# Altium PCB ZYL2(1).PcbDoc (part 1 of 2)
Units mm, origin at the board's own origin, x right, y up, seen from the top; angles counter-clockwise.
Board outline 152.4 x 101.6 mm, 2 copper layers (Top Layer, Bottom Layer); 55 components, 21 nets, 1137 pads, 477 vias.
Unrouted connection lines stored in the file: 165.
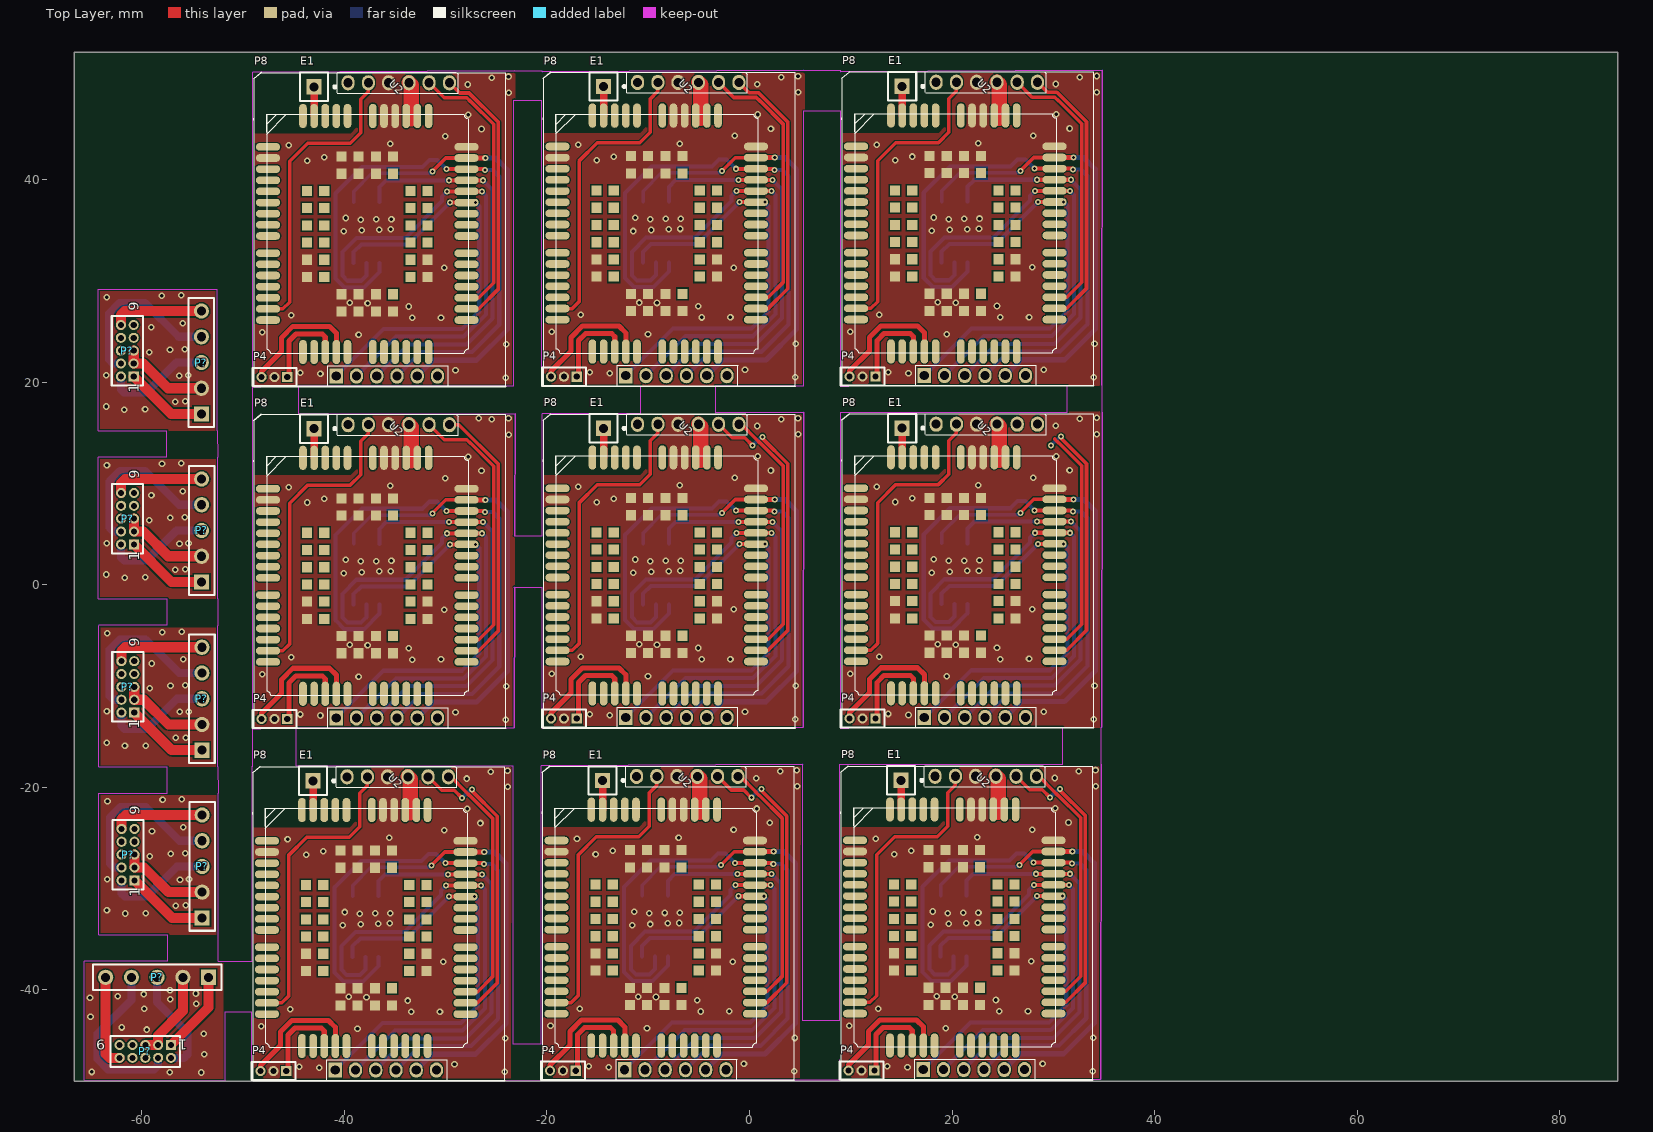
[diagram p0: Top Layer view]
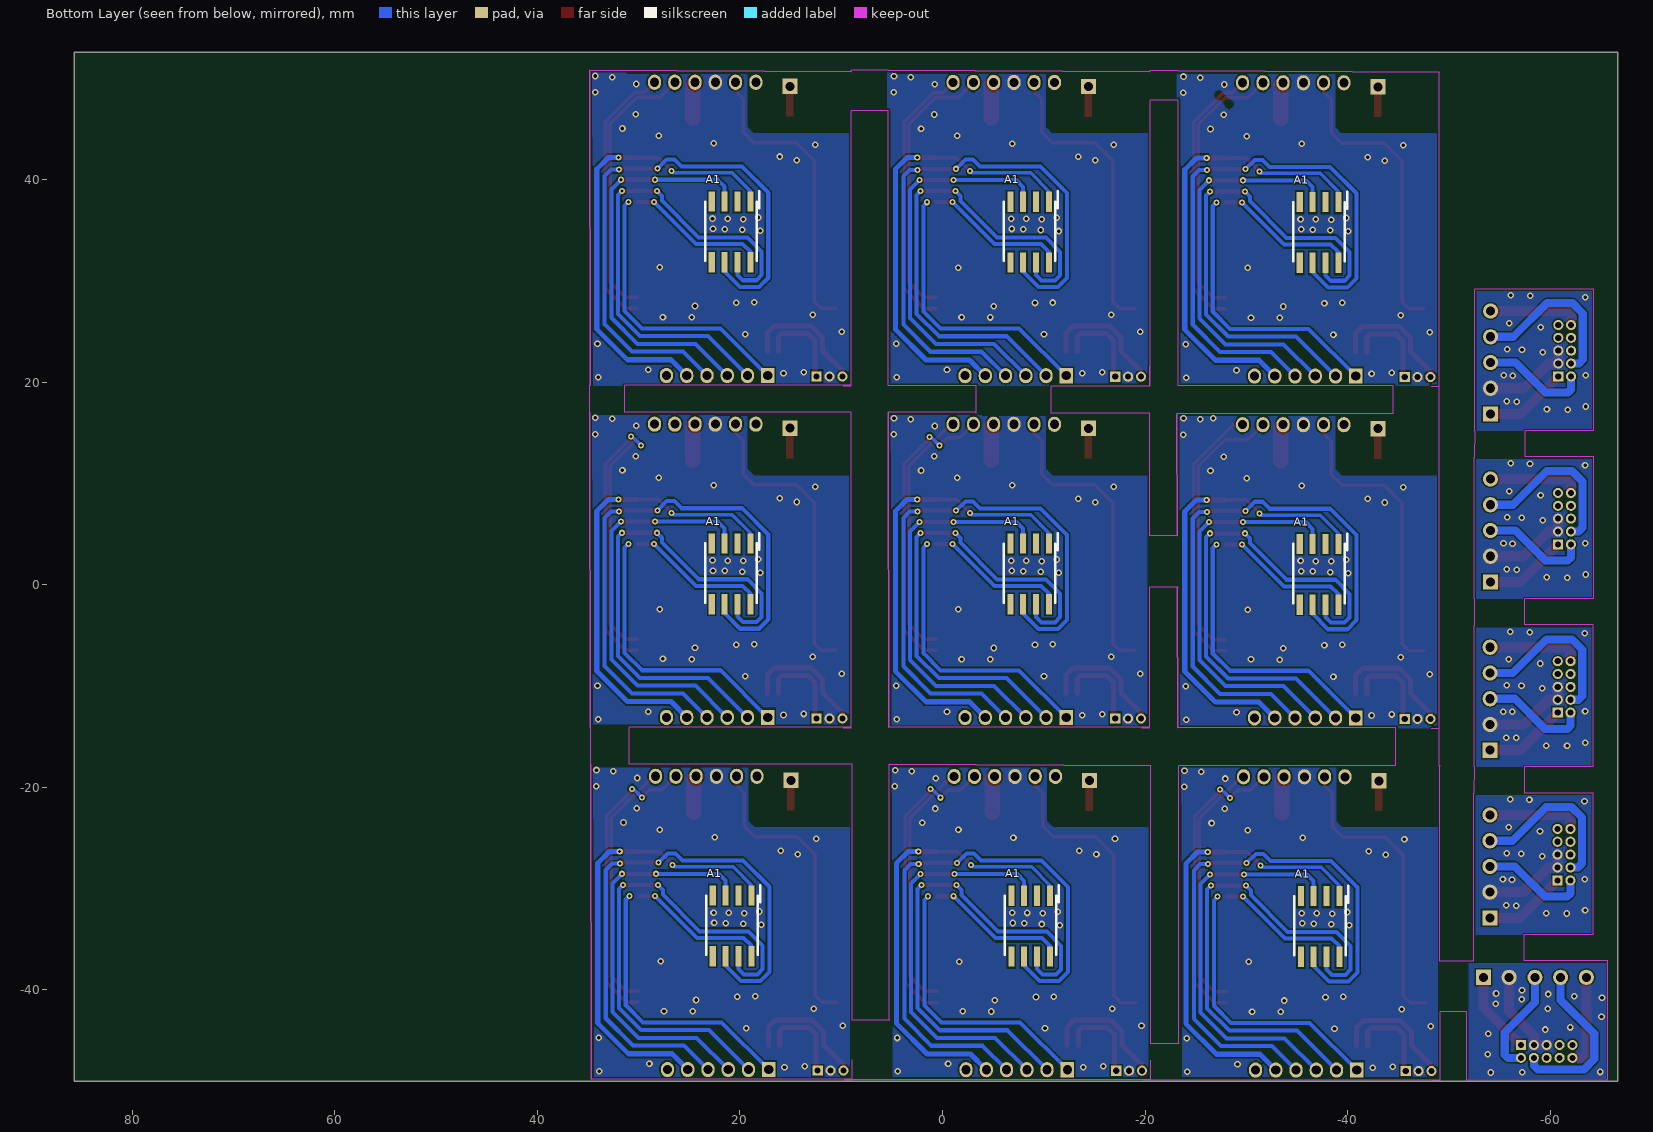
[diagram p1: Bottom Layer view, seen from below]

## Layer stack, top to bottom
Top Solder: solder mask 0.0102, Solder Resist, Dk 3.5
Top Layer: signal copper 0.0356
Dielectric 1: dielectric 0.32, FR-4, Dk 4.8
Bottom Layer: signal copper 0.0356
Bottom Solder: solder mask 0.0102, Solder Resist, Dk 3.5

## Board outline
-66.675,-49.022 85.725,-49.022 85.725,52.578 -66.675,52.578

## Design rules (kind name [scope] priority, off if disabled: settings)
Clearance [All] p1: gap=0.13 ignorepadtopadclearanceinfootprint=FALSE
HoleToHoleClearance [All] p1: gap=0 allowstackedmicrovias=TRUE
MinimumSolderMaskSliver [All] p1: minsoldermaskwidth=0
PlaneConnect [All] p1: planeconnectstyle=Direct reliefexpansion=0.508 reliefentries=4 reliefconductorwidth=0.254 reliefairgap=0.254
PolygonConnect [All] p1: connectstyle=Direct reliefconductorwidth=0.254 reliefentries=4 polygonreliefangle="90 Angle" airgapwidth=0.254
RoutingVias [All] p1: holewidth=0.3 width=0.6 viastyle="Through Hole" minholewidth=0.3 minwidth=0.6 maxholewidth=0.6 maxwidth=1.27
SilkToSilkClearance [All] p1: silktosilkclearance=0
SilkToSolderMaskClearance [IsPad] p1: minsilkscreentomaskgap=0 clearancetoexposedcopper=TRUE
SolderMaskExpansion [All] p1: expansion=0.102
Width [All] p1: maxlimit=1 minlimit=0.254 preferedwidth=0.35
25 further rules are at their usual default settings.

## Classes and differential pairs
component class smoker_v3.1a(2): C1 C12 P?

## Components (designator, comment, footprint, x,y, rotation, side; value= is the part's Value field where it differs from the comment)
A1 "SIM-SMT" SIM -39.091,37.79 r270 bottom locked
A1 "SIM-SMT" SIM -10.507,37.825 r270 bottom locked
A1 "SIM-SMT" SIM 18.974,37.841 r270 bottom locked
A1 "SIM-SMT" SIM -39.091,4.033 r270 bottom locked
A1 "SIM-SMT" SIM -10.507,4.069 r270 bottom locked
A1 "SIM-SMT" SIM 18.974,4.084 r270 bottom locked
A1 "SIM-SMT" SIM 18.872,-30.688 r270 bottom locked
A1 "SIM-SMT" SIM -10.609,-30.704 r270 bottom locked
A1 "SIM-SMT" SIM -39.192,-30.739 r270 bottom locked
E1 "Antenna" PIN1 -43.002,49.169 r270 top
E1 "Antenna" PIN1 -14.419,49.204 r270 top
E1 "Antenna" PIN1 15.062,49.219 r270 top
E1 "Antenna" PIN1 -43.002,15.412 r270 top
E1 "Antenna" PIN1 -14.419,15.447 r270 top
E1 "Antenna" PIN1 15.062,15.463 r270 top
E1 "Antenna" PIN1 14.961,-19.31 r270 top
E1 "Antenna" PIN1 -14.52,-19.325 r270 top
E1 "Antenna" PIN1 -43.104,-19.361 r270 top
P4 "Header 3" MHDR1X3 -45.644,20.51 r180 top
P4 "Header 3" MHDR1X3 -17.061,20.545 r180 top
P4 "Header 3" MHDR1X3 12.42,20.561 r180 top
P4 "Header 3" MHDR1X3 -45.644,-13.246 r180 top
P4 "Header 3" MHDR1X3 -17.061,-13.211 r180 top
P4 "Header 3" MHDR1X3 12.42,-13.196 r180 top
P4 "Header 3" MHDR1X3 12.319,-47.968 r180 top
P4 "Header 3" MHDR1X3 -17.162,-47.984 r180 top
P4 "Header 3" MHDR1X3 -45.746,-48.019 r180 top
P8 "Header 12" 95 -48.971,19.578 r0 top locked
P8 "Header 12" 95 -20.388,19.613 r0 top locked
P8 "Header 12" 95 9.093,19.629 r0 top locked
P8 "Header 12" 95 -48.971,-14.178 r0 top locked
P8 "Header 12" 95 -20.388,-14.143 r0 top locked
P8 "Header 12" 95 9.093,-14.128 r0 top locked
P8 "Header 12" 95 8.991,-48.9 r0 top locked
P8 "Header 12" 95 -20.49,-48.916 r0 top locked
P8 "Header 12" 95 -49.073,-48.951 r0 top locked
P? "Header 5H" HDR1X5 -54.127,16.866 r90 top
P? "Header 5X2H" MHDR2X5 -60.808,20.574 r90 top
P? "Header 5H" HDR1X5 -54.102,0.279 r90 top
P? "Header 5X2H" MHDR2X5 -60.782,3.988 r90 top
P? "Header 5H" HDR1X5 -54.077,-16.332 r90 top
P? "Header 5X2H" MHDR2X5 -60.757,-12.624 r90 top
P? "Header 5H" HDR1X5 -54.051,-32.893 r90 top
P? "Header 5X2H" MHDR2X5 -60.731,-29.185 r90 top
P? "Header 5X2H" MHDR2X5 -57.125,-45.441 r180 top
P? "Header 5H" HDR1X5 -53.416,-38.76 r180 top
U2 "BC95-B5" BC95 -37.745,34.64 r0 top locked
U2 "BC95-B5" BC95 -9.161,34.676 r0 top locked
U2 "BC95-B5" BC95 20.32,34.691 r0 top locked
U2 "BC95-B5" BC95 -37.745,0.884 r0 top locked
U2 "BC95-B5" BC95 -9.161,0.919 r0 top locked
U2 "BC95-B5" BC95 20.32,0.935 r0 top locked
U2 "BC95-B5" BC95 20.218,-33.838 r0 top locked
U2 "BC95-B5" BC95 -9.263,-33.854 r0 top locked
U2 "BC95-B5" BC95 -37.846,-33.889 r0 top locked

## Footprints (in the part's own frame and the unit in brackets; to place one, negate y for a bottom-side part, rotate by r counter-clockwise, add the part's x,y. Pads: shape width x height; smd on the part's side, far side on the other; paste and mask are expansions set on the pad)
95 [mm]
  rect 1.3x1.5 hole 0.9: 1(8.16,1.032)
  oval 1.3x1.5 hole 0.9: 2(10.16,1.032) 3(12.16,1.032) 4(14.16,1.032) 5(16.16,1.032) 6(18.16,1.032) 7(19.335,29.988) 8(17.335,29.988) 9(15.335,29.988) 10(13.335,29.988) 11(11.335,29.988) 12(9.335,29.988)
  silkscreen extent 0,0 24.89,31.01
BC95 [mm]
  oval 2.4x0.75 smd: 1(-9.8,8.6) 2(-9.8,7.5) 3(-9.8,6.4) 4(-9.8,5.3) 5(-9.8,4.2) 6(-9.8,3.1) 7(-9.8,2) 8(-9.8,0.9) 9(-9.8,-0.2) 10(-9.8,-1.9) 11(-9.8,-3) 12(-9.8,-4.1) 13(-9.8,-5.2) 14(-9.8,-6.3) 15(-9.8,-7.4) 16(-9.8,-8.5) 28(9.8,-8.5) 29(9.8,-7.4) 30(9.8,-6.3) 31(9.8,-5.2) 32(9.8,-4.1) 33(9.8,-3) 34(9.8,-1.9) 35(9.8,-0.2) 36(9.8,0.9) 37(9.8,2) 38(9.8,3.1) 39(9.8,4.2) 40(9.8,5.3) 41(9.8,6.4) 42(9.8,7.5) 43(9.8,8.6)
  oval 0.75x2.4 smd: 17(-6.35,-11.65) 18(-5.25,-11.65) 19(-4.15,-11.65) 20(-3.05,-11.65) 21(-1.95,-11.65) 22(0.55,-11.65) 23(1.65,-11.65) 24(2.75,-11.65) 25(3.85,-11.65) 26(4.95,-11.65) 27(6.05,-11.65) 44(6.05,11.65) 45(4.95,11.65) 46(3.85,11.65) 47(2.75,11.65) 48(1.65,11.65) 49(0.55,11.65) 50(-1.95,11.65) 51(-3.05,11.65) 52(-4.15,11.65) 53(-5.25,11.65) 54(-6.35,11.65)
  rect 1x1 smd: 55(-5.95,4.25) 56(-5.95,2.55) 57(-5.95,0.85) 58(-5.95,-0.85) 59(-5.95,-2.55) 60(-5.95,-4.25) 61(-2.55,-7.65) 62(-0.85,-7.65) 63(0.85,-7.65) 64(2.55,-7.65) 65(5.95,-4.25) 66(5.95,-2.55) 67(5.95,-0.85) 68(5.95,0.85) 69(5.95,2.55) 70(5.95,4.25) 71(2.55,7.65) 72(0.85,7.65) 73(-0.85,7.65) 74(-2.55,7.65) 75(-4.25,4.25) 76(-4.25,2.55) 77(-4.25,0.85) 78(-4.25,-0.85) 79(-4.25,-2.55) 80(-4.25,-4.25) 81(-2.55,-5.95) 82(-0.85,-5.95) 83(0.85,-5.95) 84(2.55,-5.95) 85(4.25,-4.25) 86(4.25,-2.55) 87(4.25,-0.85) 88(4.25,0.85) 89(4.25,2.55) 90(4.25,4.25) 91(2.55,5.95) 92(0.85,5.95) 93(-0.85,5.95) 94(-2.55,5.95)
  silkscreen extent -9.95,-11.8 9.95,11.8
HDR1X5 [mm] "Connector; Header; 5 Position"
  rect 1.5x1.5 hole 0.9: 1(0,0)
  round 1.5 hole 0.9: 2(2.54,0) 3(5.08,0) 4(7.62,0) 5(10.16,0)
  silkscreen extent -1.27,-1.27 11.43,1.27
MHDR1X3 [mm] "Connector; Header; 3 Position"
  rect 1x1 hole 0.6: 1(0,0)
  round 1 hole 0.6: 2(1.27,0) 3(2.54,0)
  silkscreen extent -0.9,-0.9 3.44,0.9
MHDR2X5 [mm] "Connector; Header; 5x2 Position"
  rect 1x1 hole 0.6: 1(0,0)
  round 1 hole 0.6: 2(0,1.27) 3(1.27,0) 4(1.27,1.27) 5(2.54,0) 6(2.54,1.27) 7(3.81,0) 8(3.81,1.27) 9(5.08,0) 10(5.08,1.27)
  silkscreen extent -0.9,-0.9 5.98,2.17
PIN1 [mm] "Generic Antenna; 1 Lead"
  rect 1.5x1.5 hole 0.9: 1(0,0)
  silkscreen extent -1.4,-1.4 1.4,2.18
SIM [mm]
  rect 2x0.6 smd: 1(0,0) 2(0,-1.27) 3(0,-2.54) 4(0,-3.81) 5(6,-3.81) 6(6,-2.54) 7(6,-1.27) 8(6,0)
  silkscreen extent -1.02,-4.45 5.84,0.89

## Part data
E1 E1 E1 E1 E1 E1 E1 E1 E1: "Generic Antenna", LatestRevisionDate=17-Jul-2002, LatestRevisionNote="Re-released for DXP Platform.", PackageReference=PIN1, Published=24-Mar-1999, Publisher="Altium Limited"
P4 P4 P4 P4 P4 P4 P4 P4 P4: "Header, 3-Pin", LatestRevisionDate=17-Jul-2002, LatestRevisionNote="Re-released for DXP Platform.", Publisher="Altium Limited"
P8 P8 P8 P8 P8 P8 P8 P8 P8: "Header, 12-Pin", LatestRevisionDate=17-Jul-2002, LatestRevisionNote="Re-released for DXP Platform.", Publisher="Altium Limited"
P? P? P? P? P?: "Header, 5-Pin, Right Angle", LatestRevisionDate=17-Jul-2002, LatestRevisionNote="Re-released for DXP Platform.", Publisher="Altium Limited"
P? P? P? P? P?: "Header, 5-Pin, Dual row, Right Angle", LatestRevisionDate=17-Jul-2002, LatestRevisionNote="Re-released for DXP Platform.", Publisher="Altium Limited"
U2 U2 U2 U2 U2 U2 U2 U2 U2: library part BC95

## Via types
v1: diameter 0.65, hole 0.35, Top Layer to Bottom Layer, tented both sides, 377 vias
v2: diameter 0.6, hole 0.3, Top Layer to Bottom Layer, tented both sides, 100 vias

## Nets (pads, with @x,y where several pads share a name; then routed paths per layer and width w, separated by ;. In a path a pad name is that pad's centre, name@x,y a point inside that pad or via, vN(x,y) a via of type N, cw(c..) or ccw(c..) an arc to the next point about the centre after c; other vN are vias at no path point)
ANT-GND: U2.51 U2.52 U2.54
BC95_RST: P8.11 U2.15 | length 267.7
  Top Layer w0.35: U2.15@-47.646,-41.289 -46.186,-41.289 -45.517,-40.62 -45.517,-26.726 -43.716,-24.925 -39.512,-24.925 -38.481,-23.894 -38.481,-20.593 -37.738,-19.85 P8.11@-37.738,-18.963 ; U2.15@-47.545,-6.516 -46.084,-6.516 -45.415,-5.847 -45.415,8.047 -43.614,9.848 -39.411,9.848 -38.38,10.879 -38.38,14.18 -37.636,14.923 P8.11@-37.636,15.81 ; U2.15@-47.545,27.24 -46.084,27.24 -45.415,27.909 -45.415,41.803 -43.614,43.605 -39.411,43.605 -38.38,44.636 -38.38,47.936 -37.636,48.679 P8.11@-37.636,49.566 ; U2.15@-19.063,-41.254 -17.603,-41.254 -16.934,-40.585 -16.934,-26.691 -15.132,-24.89 -10.929,-24.89 -9.898,-23.858 -9.898,-20.558 -9.155,-19.815 P8.11@-9.155,-18.928 ; U2.15@-18.961,-6.481 -17.501,-6.481 -16.832,-5.812 -16.832,8.082 -15.031,9.883 -10.827,9.883 -9.796,10.914 -9.796,14.215 -9.053,14.958 P8.11@-9.053,15.845 ; U2.15@-18.961,27.276 -17.501,27.276 -16.832,27.945 -16.832,41.838 -15.031,43.64 -10.827,43.64 -9.796,44.671 -9.796,47.972 -9.053,48.715 P8.11@-9.053,49.601 ; U2.15@10.418,-41.238 11.878,-41.238 12.547,-40.569 12.547,-26.675 14.349,-24.874 18.552,-24.874 19.583,-23.843 19.583,-20.542 20.326,-19.799 P8.11@20.326,-18.912 ; U2.15@10.52,-6.465 11.98,-6.465 12.649,-5.796 12.649,8.097 14.45,9.899 18.654,9.899 19.685,10.93 19.685,14.23 20.428,14.974 P8.11@20.428,15.86 ; U2.15@10.52,27.291 11.98,27.291 12.649,27.96 12.649,41.854 14.45,43.655 18.654,43.655 19.685,44.686 19.685,47.987 20.428,48.73 P8.11@20.428,49.617
DBG_RXD: P4.1 U2.19 | length 81.8
  Top Layer w0.5: P4.1@-45.746,-48.019 -45.568,-47.841 -45.568,-44.455 -44.882,-43.769 -42.291,-43.769 -41.996,-44.064 U2.19@-41.996,-45.539 ; P4.1@-45.644,-13.246 -45.466,-13.069 -45.466,-9.683 -44.78,-8.997 -42.19,-8.997 -41.895,-9.292 U2.19@-41.895,-10.766 ; P4.1@-45.644,20.51 -45.466,20.688 -45.466,24.074 -44.78,24.76 -42.19,24.76 -41.895,24.465 U2.19@-41.895,22.99 ; P4.1@-17.162,-47.984 -16.984,-47.806 -16.984,-44.42 -16.299,-43.734 -13.708,-43.734 -13.413,-44.029 U2.19@-13.413,-45.504 ; P4.1@-17.061,-13.211 -16.883,-13.033 -16.883,-9.647 -16.197,-8.962 -13.606,-8.962 -13.311,-9.257 U2.19@-13.311,-10.731 ; P4.1@-17.061,20.545 -16.883,20.723 -16.883,24.109 -16.197,24.795 -13.606,24.795 -13.311,24.5 U2.19@-13.311,23.026 ; P4.1@12.319,-47.968 12.497,-47.79 12.497,-44.404 13.182,-43.719 15.773,-43.719 16.068,-44.014 U2.19@16.068,-45.488 ; P4.1@12.42,-13.196 12.598,-13.018 12.598,-9.632 13.284,-8.946 15.875,-8.946 16.17,-9.241 U2.19@16.17,-10.715 ; P4.1@12.42,20.561 12.598,20.739 12.598,24.125 13.284,24.811 15.875,24.811 16.17,24.516 U2.19@16.17,23.041
DBG_TXD: P4.3 U2.20 | length 114.4
  Top Layer w0.5: P4.3@-48.286,-48.019 -48.286,-47.46 -46.322,-45.497 -46.322,-44.143 -45.194,-43.015 -41.572,-43.015 -40.896,-43.691 U2.20@-40.896,-45.539 ; P4.3@-48.184,-13.246 -48.184,-12.688 -46.22,-10.724 -46.22,-9.37 -45.093,-8.243 -41.47,-8.243 -40.795,-8.919 U2.20@-40.795,-10.766 ; P4.3@-48.184,20.51 -48.184,21.069 -46.22,23.033 -46.22,24.386 -45.093,25.514 -41.47,25.514 -40.795,24.838 U2.20@-40.795,22.99 ; P4.3@-19.702,-47.984 -19.702,-47.425 -17.738,-45.461 -17.738,-44.108 -16.611,-42.98 -12.989,-42.98 -12.313,-43.656 U2.20@-12.313,-45.504 ; P4.3@-19.601,-13.211 -19.601,-12.653 -17.637,-10.689 -17.637,-9.335 -16.509,-8.208 -12.887,-8.208 -12.211,-8.883 U2.20@-12.211,-10.731 ; P4.3@-19.601,20.545 -19.601,21.104 -17.637,23.068 -17.637,24.422 -16.509,25.549 -12.887,25.549 -12.211,24.873 U2.20@-12.211,23.026 ; P4.3@9.779,-47.968 9.779,-47.41 11.743,-45.446 11.743,-44.092 12.87,-42.965 16.492,-42.965 17.168,-43.64 U2.20@17.168,-45.488 ; P4.3@9.88,-13.196 9.88,-12.637 11.844,-10.673 11.844,-9.319 12.972,-8.192 16.594,-8.192 17.27,-8.868 U2.20@17.27,-10.715 ; P4.3@9.88,20.561 9.88,21.12 11.844,23.083 11.844,24.437 12.972,25.565 16.594,25.565 17.27,24.889 U2.20@17.27,23.041
GND: P4.2 P8.10 P?.2@-54.051,-30.353 P?.2@-54.077,-13.792 P?.2@-54.102,2.819 P?.2@-54.127,19.406 P?.2@-55.956,-38.76 P?.3@-58.395,-45.441 P?.3@-60.731,-27.915 P?.3@-60.757,-11.354 P?.3@-60.782,5.258 P?.3@-60.808,21.844 P?.5@-59.665,-45.441 P?.5@-60.731,-26.645 P?.5@-60.757,-10.084 P?.5@-60.782,6.528 P?.5@-60.808,23.114 U2.2 U2.43 U2.47 U2.48 U2.59 U2.60 U2.61 U2.62 U2.63 U2.64 U2.65 U2.66 U2.71 U2.72 U2.73 U2.74 U2.81 U2.82 U2.83 U2.92 U2.93 U2.94 | length 44.8
  Top Layer w1: P?.5@-60.808,23.114 P?.3@-60.808,21.844 -59.868,21.844 -57.429,19.406 P?.2@-54.127,19.406 ; P?.5@-60.782,6.528 P?.3@-60.782,5.258 -59.842,5.258 -57.404,2.819 P?.2@-54.102,2.819 ; P?.5@-60.757,-10.084 P?.3@-60.757,-11.354 -59.817,-11.354 -57.379,-13.792 P?.2@-54.077,-13.792 ; P?.5@-60.731,-26.645 P?.3@-60.731,-27.915 -59.792,-27.915 -57.353,-30.353 P?.2@-54.051,-30.353 ; P?.5@-59.665,-45.441 P?.3@-58.395,-45.441 -58.395,-44.501 -55.956,-42.062 P?.2@-55.956,-38.76
  other v1: -54.153,-48.158 -57.252,-48.133 -64.948,-48.108 -24.181,-48.087 4.402,-48.052 33.883,-48.037 -42.469,-47.682 -13.885,-47.646 15.596,-47.631 -44.45,-47.58 -15.867,-47.545 13.614,-47.529 -29.134,-47.351 -0.551,-47.316 28.93,-47.3 -53.848,-46.355 -24.105,-44.785 4.479,-44.75 33.96,-44.735 -53.873,-44.323 -59.512,-43.917 -38.71,-43.846 -10.126,-43.81 19.355,-43.795 -61.976,-43.713 -48.235,-43.592 -19.651,-43.556 9.83,-43.541 -65.075,-42.672 -33.401,-42.17 -30.568,-42.145 -4.818,-42.135 -1.984,-42.109 24.663,-42.119 27.497,-42.094 -45.364,-41.916 -16.781,-41.881 -59.766,-41.859 12.7,-41.865 -54.635,-41.351 -33.731,-41.052 -5.148,-41.017 24.333,-41.002 -57.201,-40.945 -65.126,-40.767 -37.821,-40.739 -9.237,-40.704 -39.573,-40.696 20.244,-40.688 -10.99,-40.661 18.491,-40.645 -62.382,-40.615 -59.817,-40.411 -54.661,-40.361 -57.226,-40.056 -30.252,-37.242 -1.668,-37.206 27.813,-37.191 -40.157,-33.636 -11.574,-33.6 17.907,-33.585 -38.379,-33.534 -9.796,-33.499 19.685,-33.483 -36.678,-33.458 -35.509,-33.432 -8.094,-33.422 -6.926,-33.397 21.387,-33.407 22.555,-33.382 -61.646,-32.461 -38.506,-32.467 -59.614,-32.436 -36.957,-32.442 -9.923,-32.432 -35.458,-32.416 -8.374,-32.406 19.558,-32.416 -6.875,-32.381 21.107,-32.391 22.606,-32.366 -39.98,-32.315 -11.396,-32.279 18.085,-32.264 -63.449,-32.156 -56.642,-31.674 -55.651,-31.648 -56.236,-29.108 -55.347,-29.083 -63.424,-29.058 -59.207,-26.797 -43.79,-26.65 -15.206,-26.615 14.275,-26.599 -57.15,-26.543 -55.702,-26.492 -42.088,-26.294 -13.505,-26.259 15.976,-26.243 -45.619,-25.126 -17.035,-25.091 12.446,-25.075 -35.594,-24.999 -7.011,-24.964 22.47,-24.948 -59.004,-24.333 -30.164,-24.238 -1.581,-24.202 27.9,-24.187 -55.905,-23.927 -26.568,-23.526 2.015,-23.491 31.496,-23.476 -27.864,-22.129 0.72,-22.094 30.201,-22.079 -63.398,-21.361 -57.963,-21.234 -56.058,-21.184 -23.876,-19.945 4.707,-19.91 34.188,-19.894 -27.94,-19.132 0.643,-19.097 30.124,-19.081 -25.552,-18.446 3.031,-18.411 32.512,-18.396 -23.901,-18.345 4.682,-18.309 34.163,-18.294 -61.671,-15.9 -59.639,-15.875 -63.475,-15.596 -56.667,-15.113 -55.677,-15.088 -24.079,-13.315 4.504,-13.28 33.985,-13.264 -42.367,-12.909 -13.784,-12.874 15.697,-12.858 -44.348,-12.807 -15.765,-12.772 13.716,-12.757 -29.032,-12.578 -56.261,-12.548 -0.449,-12.543 -55.372,-12.522 29.032,-12.527 -63.449,-12.497 -59.233,-10.236 -24.003,-10.013 -57.175,-9.982 4.58,-9.978 34.061,-9.962 -55.728,-9.931 -38.608,-9.073 -10.025,-9.038 19.456,-9.022 -48.133,-8.819 -19.55,-8.784 9.931,-8.768 -59.03,-7.772 -33.299,-7.397 -55.931,-7.366 -30.466,-7.372 -4.716,-7.362 -1.883,-7.337 24.765,-7.346 27.598,-7.321 -45.263,-7.143 -16.679,-7.108 12.802,-7.092 -33.63,-6.28 -5.046,-6.244 24.435,-6.229 -37.719,-5.966 -9.136,-5.931 -39.472,-5.923 20.345,-5.915 -10.888,-5.888 18.593,-5.873 -63.424,-4.801 -57.988,-4.674 -56.083,-4.623 -30.15,-2.469 -1.567,-2.434 27.914,-2.418 -61.697,0.711 -59.665,0.737 -63.5,1.016 -40.056,1.137 -11.472,1.172 18.009,1.188 -38.278,1.239 -9.694,1.274 19.787,1.29 -36.576,1.315 -35.408,1.34 -7.993,1.35 -6.824,1.376 21.488,1.366 22.657,1.391 -56.693,1.499 -55.702,1.524 -38.405,2.306 -36.855,2.331 -9.821,2.341 -35.357,2.356 -8.272,2.366 19.66,2.356 -6.773,2.392 21.209,2.382 22.708,2.407 -39.878,2.458 -11.295,2.493 18.186,2.509 -56.286,4.064 -55.397,4.089 -63.475,4.115 -59.258,6.375 -57.201,6.629 -55.753,6.68 -43.688,8.123 -15.105,8.158 14.376,8.174 -41.986,8.478 -13.403,8.514 16.078,8.529 -59.055,8.839 -55.956,9.246 -45.517,9.647 -16.934,9.682 12.547,9.698 -35.493,9.774 -6.909,9.809 22.572,9.825 -30.062,10.535 -1.479,10.57 28.002,10.586 -26.467,11.246 2.117,11.282 31.598,11.297 -63.449,11.811 -58.014,11.938 -56.109,11.989 -27.762,12.643 0.821,12.679 30.302,12.694 -23.774,14.828 4.809,14.863 34.29,14.879 0.745,15.676 30.226,15.691 -25.451,16.326 3.133,16.362 32.614,16.377 -26.746,16.434 -23.8,16.428 4.784,16.463 34.265,16.479 -61.722,17.297 -59.69,17.323 -63.525,17.602 -56.718,18.085 -55.728,18.11 -24.079,20.442 4.504,20.477 33.985,20.493 -56.312,20.65 -55.423,20.676 -63.5,20.701 -42.367,20.848 -13.784,20.883 15.697,20.898 -44.348,20.949 -15.765,20.984 13.716,21 -29.032,21.178 -0.449,21.214 29.032,21.229 -59.284,22.962 -57.226,23.216 -55.778,23.266 -24.003,23.744 4.58,23.779 34.061,23.795 -38.608,24.684 -10.025,24.719 19.456,24.734 -48.133,24.938 -19.55,24.973 9.931,24.988 -59.08,25.425 -55.982,25.832 -33.299,26.359 -30.466,26.385 -4.716,26.395 -1.883,26.42 24.765,26.41 27.598,26.436 -45.263,26.613 -16.679,26.649 12.802,26.664 -33.63,27.477 -5.046,27.512 24.435,27.528 -37.719,27.79 -9.136,27.826 -39.472,27.833 20.345,27.841 -10.888,27.868 18.593,27.884 -63.475,28.397 -58.039,28.524 -56.134,28.575 -30.15,31.288 -1.567,31.323 27.914,31.338 -40.056,34.894 -11.472,34.929 18.009,34.945 -38.278,34.995 -9.694,35.031 19.787,35.046 -36.576,35.072 -35.408,35.097 -7.993,35.107 -6.824,35.132 21.488,35.122 22.657,35.148 -38.405,36.062 -36.855,36.088 -9.821,36.097 -35.357,36.113 -8.272,36.123 19.66,36.113 -6.773,36.148 21.209,36.138 22.708,36.164 -39.878,36.215 -11.295,36.25 18.186,36.265 -43.688,41.879 -15.105,41.915 14.376,41.93 -41.986,42.235 -13.403,42.27 16.078,42.286 -45.517,43.403 -16.934,43.439 12.547,43.454 -35.493,43.53 -6.909,43.566 22.572,43.581 -30.062,44.292 -1.479,44.327 28.002,44.343 -26.467,45.003 2.117,45.038 31.598,45.054 -27.762,46.4 0.821,46.435 30.302,46.451 -23.774,48.584 4.809,48.62 34.29,48.635 -27.838,49.397 0.745,49.432 30.226,49.448 -25.451,50.083 3.133,50.118 32.614,50.134 -23.8,50.185 4.784,50.22 34.265,50.235
nC: P?.9
NetE1_1: E1.1 U2.53
nRESET: P?.5@-54.051,-22.733 P?.5@-54.077,-6.172 P?.5@-54.102,10.439 P?.5@-54.127,27.026 P?.5@-63.576,-38.76 P?.10 | length 45.5
  Top Layer w1: P?.5@-63.576,-38.76 -63.576,-46.33 -63.195,-46.711 P?.10@-62.205,-46.711 ; P?.10@-62.078,25.654 -62.078,26.645 -61.697,27.026 P?.5@-54.127,27.026 ; P?.10@-62.052,9.068 -62.052,10.058 -61.671,10.439 P?.5@-54.102,10.439 ; P?.10@-62.027,-7.544 -62.027,-6.553 -61.646,-6.172 P?.5@-54.077,-6.172 ; P?.10@-62.001,-24.105 -62.001,-23.114 -61.62,-22.733 P?.5@-54.051,-22.733
RX: P8.7@28.326,-18.912 P8.7@28.428,15.86 P8.7@-1.053,15.845 P8.7@-1.155,-18.928 P8.7@-29.738,-18.963 P8.8@26.428,49.617 P8.8@-3.053,49.601 P8.8@-31.636,15.81 P8.8@-31.636,49.566 U2.30 | length 230.9
  Top Layer w0.35: P8.8@-31.636,15.81 -30.151,14.324 -27.91,14.324 -27.556,13.969 -27.538,13.969 -25.273,11.704 -25.273,-3.942 -26.747,-5.416 U2.30@-27.945,-5.416 ; P8.8@-31.636,49.566 -30.151,48.08 -27.91,48.08 -27.556,47.726 -27.538,47.726 -25.273,45.461 -25.273,29.814 -26.747,28.34 U2.30@-27.945,28.34 ; P8.7@-29.738,-18.963 -29.48,-18.963 -28.012,-20.431 -28.012,-20.449 -27.657,-20.803 -27.64,-20.803 -25.375,-23.068 -25.375,-38.715 -26.849,-40.189 U2.30@-28.046,-40.189 ; P8.8@-3.053,49.601 -1.567,48.116 0.673,48.116 1.028,47.761 1.045,47.761 3.31,45.496 3.31,29.85 1.836,28.376 U2.30@0.639,28.376 ; P8.7@-1.155,-18.928 -0.897,-18.928 0.572,-20.396 0.572,-20.414 0.926,-20.768 0.943,-20.768 3.209,-23.033 3.209,-38.68 1.735,-40.154 U2.30@0.537,-40.154 ; P8.7@-1.053,15.845 -0.795,15.845 0.673,14.376 0.673,14.359 1.028,14.005 1.045,14.005 3.31,11.739 3.31,-3.907 1.836,-5.381 U2.30@0.639,-5.381 ; P8.8@26.428,49.617 27.896,48.149 30.137,48.149 30.509,47.777 30.526,47.777 32.791,45.512 32.791,29.865 31.317,28.391 U2.30@30.12,28.391 ; P8.7@28.326,-18.912 28.584,-18.912 30.053,-20.381 30.053,-20.398 30.407,-20.752 30.424,-20.752 32.69,-23.018 32.69,-38.664 31.216,-40.138 U2.30@30.018,-40.138 ; P8.7@28.428,15.86 P8.7@28.686,15.86 ; U2.30@30.12,-5.365 31.317,-5.365 32.791,-3.891 32.791,11.755 30.526,14.02 30.509,14.02 30.154,14.375 30.154,14.392
SIM_CLK: A1.6 P8.4 U2.41 | length 536.7
  Top Layer w0.4: v2(-30.024,-27.489) U2.41@-28.046,-27.489 -26.339,-27.489 v2(-26.238,-27.59) ; v2(-29.922,7.284) U2.41@-27.945,7.284 -26.238,7.284 v2(-26.137,7.183) ; v2(-29.922,41.04) U2.41@-27.945,41.04 -26.238,41.04 v2(-26.137,40.94) ; v2(-1.44,-27.454) U2.41@0.537,-27.454 2.244,-27.454 v2(2.345,-27.554) ; v2(-1.339,7.319) U2.41@0.639,7.319 2.346,7.319 v2(2.447,7.218) ; v2(-1.339,41.076) U2.41@0.639,41.076 2.346,41.076 v2(2.447,40.975) ; v2(28.041,-27.438) U2.41@30.018,-27.438 31.725,-27.438 v2(31.826,-27.539) ; v2(28.142,7.335) U2.41@30.12,7.335 31.827,7.335 v2(31.928,7.234) ; v2(28.142,41.091) U2.41@30.12,41.091 31.827,41.091 v2(31.928,40.99)
  Bottom Layer w0.4: A1.6@-36.652,-36.739 -36.652,-37.633 -38.185,-39.166 -40.073,-39.166 -40.964,-38.275 -40.964,-29.869 -38.36,-27.266 -32.391,-27.266 -31.699,-26.574 -30.939,-26.574 v2(-30.024,-27.489) ; A1.6@-36.551,-1.967 -36.551,-2.86 -38.083,-4.393 -39.971,-4.393 -40.862,-3.502 -40.862,4.903 -38.259,7.507 -32.29,7.507 -31.598,8.199 -30.837,8.199 v2(-29.922,7.284) ; A1.6@-36.551,31.79 -36.551,30.896 -38.083,29.364 -39.971,29.364 -40.862,30.255 -40.862,38.66 -38.259,41.264 -32.29,41.264 -31.598,41.956 -30.837,41.956 v2(-29.922,41.04) ; P8.4@-34.913,-47.919 -32.549,-45.555 -27.518,-45.555 -24.816,-42.853 -24.816,-28.225 -25.451,-27.59 v2(-26.238,-27.59) ; P8.4@-34.811,-13.146 -32.448,-10.783 -27.417,-10.783 -24.714,-8.081 -24.714,6.548 -25.349,7.183 v2(-26.137,7.183) ; P8.4@-34.811,20.61 -32.448,22.974 -27.417,22.974 -24.714,25.676 -24.714,40.305 -25.349,40.94 v2(-26.137,40.94) ; A1.6@-8.069,-36.704 -8.069,-37.598 -9.602,-39.13 -11.489,-39.13 -12.381,-38.239 -12.381,-29.834 -9.777,-27.23 -3.808,-27.23 -3.116,-26.538 -2.356,-26.538 v2(-1.44,-27.454) ; A1.6@-7.967,-1.931 -7.967,-2.825 -9.5,-4.358 -11.388,-4.358 -12.279,-3.467 -12.279,4.939 -9.675,7.542 -3.706,7.542 -3.014,8.234 -2.254,8.234 v2(-1.339,7.319) ; A1.6@-7.967,31.825 -7.967,30.931 -9.5,29.399 -11.388,29.399 -12.279,30.29 -12.279,38.695 -9.675,41.299 -3.706,41.299 -3.014,41.991 -2.254,41.991 v2(-1.339,41.076) ; P8.4@-6.33,-47.884 -3.966,-45.52 1.065,-45.52 3.767,-42.818 3.767,-28.189 3.132,-27.554 v2(2.345,-27.554) ; P8.4@-6.228,-13.111 -3.864,-10.748 1.167,-10.748 3.869,-8.045 3.869,6.583 3.234,7.218 v2(2.447,7.218) ; P8.4@-6.228,20.645 -3.864,23.009 1.167,23.009 3.869,25.711 3.869,40.34 3.234,40.975 v2(2.447,40.975) ; A1.6@21.412,-36.688 21.412,-37.582 19.879,-39.115 17.991,-39.115 17.1,-38.224 17.1,-29.818 19.704,-27.215 25.673,-27.215 26.365,-26.523 27.125,-26.523 v2(28.041,-27.438) ; A1.6@21.514,-1.916 21.514,-2.81 19.981,-4.342 18.093,-4.342 17.202,-3.451 17.202,4.954 19.806,7.558 25.775,7.558 26.467,8.25 27.227,8.25 v2(28.142,7.335) ; A1.6@21.514,31.841 21.514,30.947 19.981,29.414 18.093,29.414 17.202,30.306 17.202,38.711 19.806,41.315 25.775,41.315 26.467,42.006 27.227,42.006 v2(28.142,41.091) ; P8.4@23.151,-47.868 25.515,-45.505 30.546,-45.505 33.248,-42.803 33.248,-28.174 32.613,-27.539 v2(31.826,-27.539) ; P8.4@23.253,-13.096 25.617,-10.732 30.648,-10.732 33.35,-8.03 33.35,6.599 32.715,7.234 v2(31.928,7.234) ; P8.4@23.253,20.661 25.617,23.025 30.648,23.025 33.35,25.727 33.35,40.355 32.715,40.99 v2(31.928,40.99)
SIM_DATA: A1.3 P8.3 U2.40 | length 358.4
  Top Layer w0.4: v2(-29.78,-28.589) U2.40@-28.046,-28.589 v2(-26.408,-28.589) ; v2(-29.679,6.184) U2.40@-27.945,6.184 v2(-26.306,6.184) ; v2(-29.679,39.94) U2.40@-27.945,39.94 v2(-26.306,39.94) ; v2(-1.197,-28.554) U2.40@0.537,-28.554 v2(2.176,-28.554) ; v2(-1.095,6.219) U2.40@0.639,6.219 v2(2.277,6.219) ; v2(-1.095,39.976) U2.40@0.639,39.976 v2(2.277,39.976) ; v2(28.284,-28.538) U2.40@30.018,-28.538 v2(31.657,-28.538) ; v2(28.386,6.235) U2.40@30.12,6.235 v2(31.758,6.235) ; v2(28.386,39.991) U2.40@30.12,39.991 v2(31.758,39.991)
  Bottom Layer w0.4: P8.3@-36.913,-47.919 -33.779,-44.785 -28.042,-44.785 -25.47,-42.214 -25.47,-29.526 v2(-26.408,-28.589) ; P8.3@-36.811,-13.146 -33.678,-10.013 -27.94,-10.013 -25.368,-7.441 -25.368,5.246 v2(-26.306,6.184) ; P8.3@-36.811,20.61 -33.678,23.744 -27.94,23.744 -25.368,26.316 -25.368,39.003 v2(-26.306,39.94) ; A1.3@-36.652,-30.739 -36.652,-29.266 -35.975,-28.589 v2(-29.78,-28.589) ; A1.3@-36.551,4.033 -36.551,5.507 -35.874,6.184 v2(-29.679,6.184) ; A1.3@-36.551,37.79 -36.551,39.263 -35.874,39.94 v2(-29.679,39.94) ; P8.3@-8.33,-47.884 -5.196,-44.75 0.542,-44.75 3.113,-42.178 3.113,-29.491 v2(2.176,-28.554) ; P8.3@-8.228,-13.111 -5.094,-9.978 0.643,-9.978 3.215,-7.406 3.215,5.281 v2(2.277,6.219) ; P8.3@-8.228,20.645 -5.094,23.779 0.643,23.779 3.215,26.351 3.215,39.038 v2(2.277,39.976) ; A1.3@-8.069,-30.704 -8.069,-29.231 -7.392,-28.554 v2(-1.197,-28.554) ; A1.3@-7.967,4.069 -7.967,5.542 -7.29,6.219 v2(-1.095,6.219) ; A1.3@-7.967,37.825 -7.967,39.298 -7.29,39.976 v2(-1.095,39.976) ; P8.3@21.151,-47.868 24.285,-44.735 30.023,-44.735 32.594,-42.163 32.594,-29.476 v2(31.657,-28.538) ; P8.3@21.253,-13.096 24.387,-9.962 30.124,-9.962 32.696,-7.39 32.696,5.297 v2(31.758,6.235) ; P8.3@21.253,20.661 24.387,23.795 30.124,23.795 32.696,26.366 32.696,39.054 v2(31.758,39.991) ; A1.3@21.412,-30.688 21.412,-29.215 22.089,-28.538 v2(28.284,-28.538) ; A1.3@21.514,4.084 21.514,5.557 22.191,6.235 v2(28.386,6.235) ; A1.3@21.514,37.841 21.514,39.314 22.191,39.991 v2(28.386,39.991)